# Altium PCB Conductivity.PcbDoc
Units mil, origin at the board's own origin, x right, y up, seen from the top; angles counter-clockwise.
Board outline 1417.32 x 1417.32 mil, 2 copper layers (Top Layer, Bottom Layer); 42 components, 27 nets, 107 pads, 21 vias.
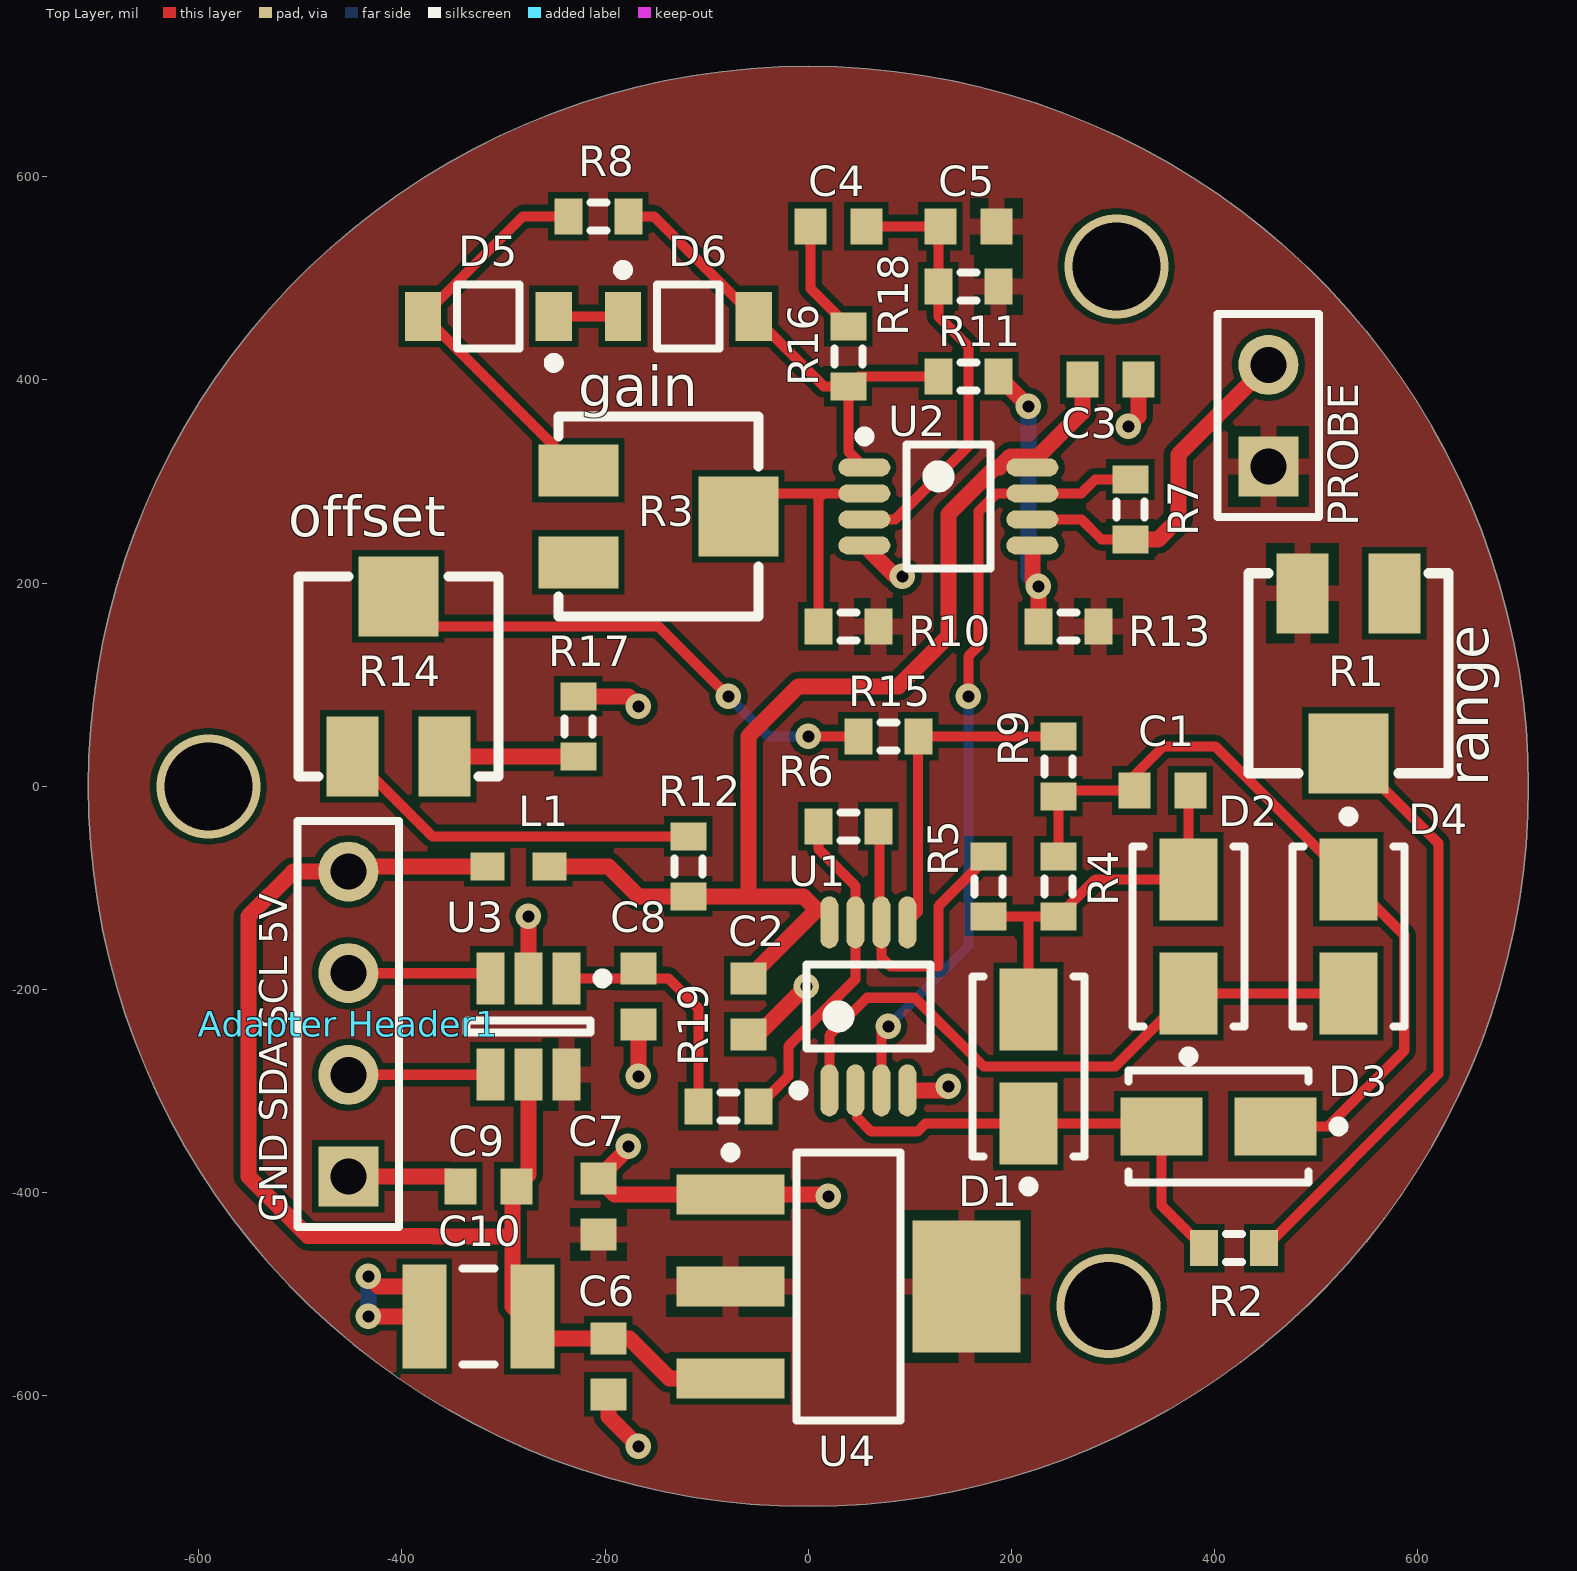
[diagram p0: Top Layer view]
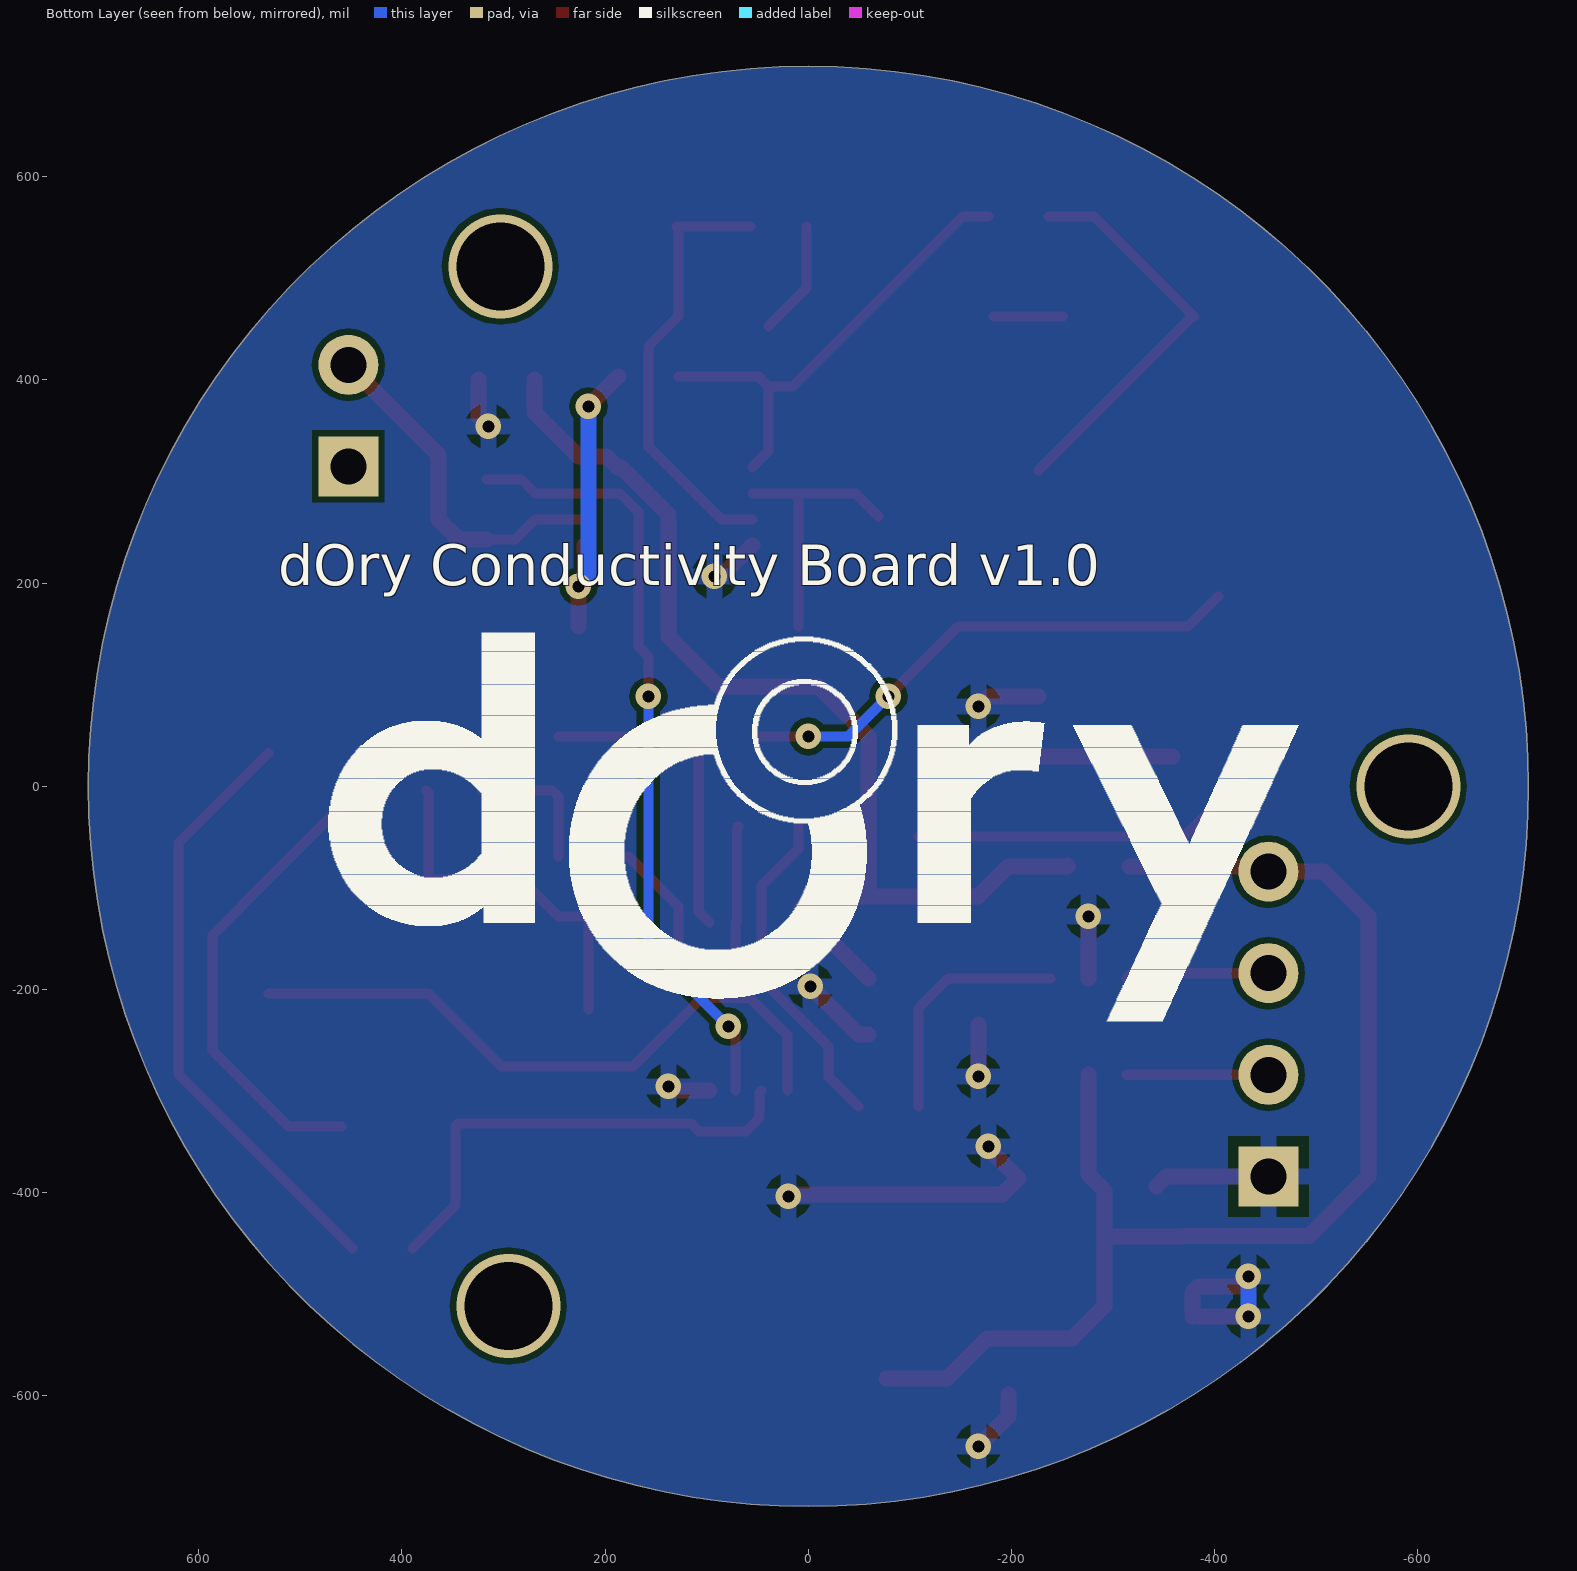
[diagram p1: Bottom Layer view, seen from below]

## Layer stack, top to bottom
Top Solder: solder mask 0.4, Solder Resist, Dk 3.5
Top Layer: signal copper 1.4
Dielectric 1: dielectric 12.6, FR-4, Dk 4.8
Bottom Layer: signal copper 1.4
Bottom Solder: solder mask 0.4, Solder Resist, Dk 3.5

## Board outline
-708.66,0 ccw(c0,0) 0,-708.66 ccw(c0,0) 708.66,0 ccw(c0,0) 0,708.66 ccw(c0,0)

## Design rules (kind name [scope] priority, off if disabled: settings)
AssemblyTestPointUsage SilkToBoardRegionClearance [All] p2:
Clearance [All] p1: gap=6
MatchedLengths DiffPair_DIFF100MatchedLengths [InDifferentialPairClass('DIFF100')] p1: tolerance=6 checknetsindiffpair=TRUE checkdiffpairvsdiffpair=FALSE checkothers=FALSE
MinimumSolderMaskSliver SilkscreenOverComponentPads_1 [All] p2: minsoldermaskwidth=10
MinimumSolderMaskSliver SilkToSolderMaskClearance [IsPad] p3: minsoldermaskwidth=10
MinimumSolderMaskSliver SilkscreenOverComponentPads [All] p4: minsoldermaskwidth=10
PolygonConnect [All] p1: connectstyle=Relief reliefconductorwidth=16 reliefentries=4 polygonreliefangle="90 Angle" airgapwidth=10
RoutingVias [All] p1: holewidth=12 width=25 viastyle="Through Hole" minholewidth=12 minwidth=25 maxholewidth=28 maxwidth=50
SilkToBoardRegionClearance SilkToBoardRegionClearance_1 [All] p1:
SilkToSolderMaskClearance SilkToSolderMaskClearance_1 [IsPad] p1: minsilkscreentomaskgap=10 clearancetoexposedcopper=TRUE
SolderMaskExpansion [All] p1: expansion=4
Width power_width [(InNet('+2.5') OR InNet('+5') OR InNet('GND')        OR InNet('VCC'))] p1: maxlimit=30 minlimit=10 preferedwidth=16 toplayer_maxwidth=20 minimp=50.000000 maximp=50.000000 favimp=50.000000
Width [All] p2: maxlimit=100 minlimit=6 preferedwidth=10
27 further rules are at their usual default settings.

## Components (designator, comment, footprint, x,y, rotation, side; value= is the part's Value field where it differs from the comment)
"Adapter Header1" "Adapter Header" "Adapter Header" -452.76,-383.86 r90 top
C1 "Cap Semi" 1608[0603] 348.52,-4.03 r0 top
C2 "Cap Semi" 1608[0603] -59.05,-216.54 r270 top
C3 "Cap Semi" 1608[0603] 297.24,400.53 r0 top
C4 "Cap Semi" 1608[0603] 29.53,551.18 r180 top
C5 "Cap Semi" 1608[0603] 157.48,551.18 r180 top
C6 "Cap Semi" 1608[0603] -196.85,-570.87 r90 top
C7 "Cap Semi" 1608[0603] -206.69,-413.39 r270 top
C8 "Cap Semi" 1608[0603] -167.32,-206.69 r90 top
C9 "Cap Semi" 1608[0603] -314.96,-393.7 r0 top
C10 "Cap Semi" C1210 -324.8,-521.65 r0 top
D1 "1N4007" VISH-DO-214AC-2_L 216.54,-275.59 r90 top
D2 "1N4007" VISH-DO-214AC-2_L 374.02,-147.64 r90 top
D3 "1N4007" VISH-DO-214AC-2_L 403.54,-334.65 r180 top
D4 "1N4007" VISH-DO-214AC-2_L 531.5,-147.64 r270 top
D5 "MBR0520LT1G" ONSC-SOD-123-2-425-04_V -314.96,462.6 r180 top
D6 "MBR0520LT1G" ONSC-SOD-123-2-425-04_V -118.11,462.6 r0 top
L1 "742861210" SMD-0603 -285.43,-78.74 r180 top
PROBE "Header 2" HDR1X2 452.76,314.96 r90 top (schematic designator PROBE1)
R1 "RPot SM" POT4MM-2 531.5,111.29 r270 top
R2 "Res3" J1-0603 419.13,-454.57 r0 top
R3 "RPot SM" POT4MM-2 -147.64,265.75 r0 top
R4 "Res3" J1-0603 246.06,-98.43 r270 top
R5 "Res3" J1-0603 177.17,-98.43 r90 top
R6 "Res3" J1-0603 39.37,-39.37 r180 top
R7 "Res3" J1-0603 316.93,272.57 r90 top
R8 "Res3" J1-0603 -206.69,561.02 r180 top
R9 "Res3" J1-0603 246.06,19.68 r90 top
R10 "Res3" J1-0603 39.37,157.48 r180 top
R11 "Res3" J1-0603 157.48,403.54 r0 top
R12 "Res3" J1-0603 -118.11,-78.74 r270 top
R13 "Res3" J1-0603 255.91,157.48 r180 top
R14 "RPot SM" POT4MM-2 -403.54,108.27 r90 top
R15 "Res3" J1-0603 78.74,49.21 r0 top
R16 "Res3" J1-0603 39.37,423.23 r90 top
R17 "Res3" J1-0603 -226.38,59.06 r270 top
R18 "Res3" J1-0603 157.48,492.13 r180 top
R19 "Res3" J1-0603 -78.74,-314.96 r180 top
U1 "LTC2055IMS8#TR" LT-MS8-8_L 59.06,-216.54 r90 top
U2 "LTC2055IMS8#TR" LT-MS8-8_L 137.8,275.59 r0 top
U3 "MCP3421A1T-E/CH" SOT-23-CH6_M -275.59,-236.22 r270 top
U4 "LM1117MP-2.5/NOPB" MP04A_M 39.37,-492.13 r0 top

## Footprints (in the part's own frame and the unit in brackets; to place one, negate y for a bottom-side part, rotate by r counter-clockwise, add the part's x,y. Pads: shape width x height; smd on the part's side, far side on the other; paste and mask are expansions set on the pad)
1608[0603] [mm] "Chip Capacitor, Body 1.6x0.8mm, IPC High Density"
  rect 0.8x0.9 smd: 1(-0.7,0) 2(0.7,0)
  body extent -0.87,-0.48 0.87,0.48, height 1.3
"Adapter Header" [mm] "Connector; Header; 4 Position"
  rect 1.5x1.5 hole 0.9: 1(0,0)
  round 1.5 hole 0.9: 2(2.54,0) 3(5.08,0) 4(7.62,0)
  silkscreen extent -1.27,-1.27 8.89,1.27
C1210 [mm] "Chip Capacitor, Body 3.2x2.5mm, IPC High Density"
  rect 1.1x2.6 smd: 1(-1.35,0) 2(1.35,0)
  silkscreen extent -0.4,-1.2 0.4,1.2, body extent -1.7,-1.35 1.7,1.35, height 1.3
HDR1X2 [mm] "Connector; Header; 2 Position"
  rect 1.5x1.5 hole 0.9: 1(0,0)
  round 1.5 hole 0.9: 2(2.54,0)
  silkscreen extent -1.27,-1.27 3.81,1.27
J1-0603 [mm] "Chip Resistor, Body 1.6x0.8mm, IPC High Density"
  rect 0.7x0.9 smd: 1(-0.75,0) 2(0.75,0)
  silkscreen extent -0.2,-0.35 0.2,0.35, body extent -0.85,-0.48 0.85,0.48, height 0.9
LT-MS8-8_L [mm] "SOP, 8-Leads, Body 3x3mm, Pitch 0.65mm, IPC High Density"
  oval 1.3x0.45 smd: 1(-2.1,0.975) 2(-2.1,0.325) 3(-2.1,-0.325) 4(-2.1,-0.975) 5(2.1,-0.975) 6(2.1,-0.325) 7(2.1,0.325) 8(2.1,0.975)
  silkscreen extent -2.22,-1.55 1.05,1.87, body extent -1.55,-1.55 1.55,1.55, height 1.1
MP04A_M [mm] "SOT223, 4-Leads, Body 6.5x3.5mm, Pitch 2.3mm, Lead Span 7mm, IPC Low Density"
  rect 2.7x1 smd: 1(-2.95,2.3) 2(-2.95,0) 3(-2.95,-2.3)
  rect 2.7x3.3 smd: 4(2.95,0)
  silkscreen extent -3.07,-3.35 1.3,3.47, body extent -1.86,-3.35 1.86,3.35, height 1.8
ONSC-SOD-123-2-425-04_V [mm] "SOD, 2-Leads, Body 2.69x1.6mm"
  rect 0.91x1.22 smd: 1(-1.635,0) 2(1.635,0)
  silkscreen extent -1.76,-0.8 0.78,1.28, body extent -1.35,-0.8 1.35,0.8, height 1.35
POT4MM-2 [mm] "Square Trimming Potentiometer"
  rect 2x1.3 smd: CCW(-2,-1.15) CW(-2,1.15)
  rect 2x2 smd: W(2,0)
  silkscreen extent -2.5,-2.5 2.5,2.5
SMD-0603 [mm] "Chip Inductor, 2-Leads, Body 1.6x0.8mm"
  rect 0.85x0.7 smd: 1(-0.775,0) 2(0.775,0)
  body extent -0.8,-0.4 0.8,0.4, height 0.79
SOT-23-CH6_M [mm] "SOT23, 6-Leads, Body 2.9x1.7mm, Pitch 0.95mm, Lead Span 2.8mm, IPC Low Density"
  rect 1.3x0.7 smd: 1(-1.2,0.95) 2(-1.2,0) 3(-1.2,-0.95) 4(1.2,-0.95) 5(1.2,0) 6(1.2,0.95)
  silkscreen extent -1.32,-1.55 0.15,1.98, body extent -0.9,-1.55 0.9,1.55, height 1.45
VISH-DO-214AC-2_L [mm] "DO-214AC, 2-Leads, Body 4.5x2.79mm, IPC High Density"
  rect 2.05x1.45 smd: 1(-1.425,0) 2(1.425,0)
  silkscreen extent -3.12,-1.4 2.25,1.4, body extent -2.25,-1.4 2.25,1.4, height 2.29

## Part data
"Adapter Header1": "Header, 4-Pin"
C1 C2 C3 C4 C5 C6 C7 C8 C9 C10: "Capacitor (Semiconductor SIM Model)"
D1 D2 D3 D4: library part CMP-0548-00220-2, "Transient Voltage Suppressor, 6.40 to 231 V, 188 V Stand-off Voltage, Uni-Directional, -55 to 155 degC, 2-pin DO-214AC, Pb-Free, Tape and Reel"
D5 D6: library part CMP-1055-00425-1, "Schottky Power Rectifier, 2-Pin SOD-123, Pb-Free, Tape and Reel"
L1: library part CMP-0220-00121-1, "SMD EMI Suppression Ferrite Bead WE-CBF HF, Z = 1000 Ohm"
PROBE: "Header, 2-Pin"
R1 R3 R14: "Square Trimming Potentiometer"
R2 R4 R5 R6 R7 R8 R9 R10 R11 R12 R13 R15 R16 R17 R18 R19: "Resistor"
U1 U2: library part CMP-0359-00930-2, "Dual Channel, Micropower Zero-Drift Operational Amplifier, 0.5 MHz Typical GBW, 0.5 V/us Typical SR, 2.7 to 6 V, 8-Pin SOP (MS8-8), Industrial, Reel"
U3: library part CMP-0188-00757-2, "18-Bit Analog-to-Digital Converter with I2C Interface and On-Board Reference, 6-Pin SOT-23, Extended Temperature, Tape and Reel"
U4: library part CMP-0062-01660-2, "800mA Low-Dropout Linear Regulator, 4-pin SOT-223, Pb-Free"

## Via types
v1: diameter 25, hole 12, Top Layer to Bottom Layer, 18 vias
v2: diameter 102.36, hole 86.61, Top Layer to Bottom Layer, 3 vias

## Nets (pads, with @x,y where several pads share a name; then routed paths per layer and width w, separated by ;. In a path a pad name is that pad's centre, name@x,y a point inside that pad or via, vN(x,y) a via of type N, cw(c..) or ccw(c..) an arc to the next point about the centre after c; other vN are vias at no path point)
+2.5: C5.1 C7.2 PROBE.1 R1.CCW R10.1 R13.1 R18.1 U3.6 U4.2 U4.4
+5: C2.1 C3.1 L1.1 R12.2 U1.8 U2.8 | length 1098
  Top Layer w16: L1.1@-254.92,-77.76 L1.1 -196.85,-78.74 -167.32,-108.27 -59.05,-108.27 ; C2.1 7.87,-122.05 7.87,-121.06 -4.92,-108.27 -59.05,-108.27 ; C3.1 269.69,368.11 226.38,324.8 198.82,324.8 187.99,313.98 184.09,313.98 137.8,267.69 137.8,147.64 88.58,98.43 -9.84,98.43 -59.05,49.21 -59.05,-108.27
EC_FILTERED_OUT: C8.2 R19.2 U3.1 | length 238.6
  Top Layer w10: U3.1 -137.8,-188.98 -108.27,-218.5 R19.2
ECV_OUT: R6.2 R19.1 U1.7 | length 330.2
  Top Layer w10: R19.1 -19.68,-285.43 -19.68,-255.91 46.26,-189.96 U1.7 46.26,-97.9 9.84,-61.48 R6.2
GND: "Adapter Header1.1" C2.2 C3.2 C6.1 C7.1 C8.1 C9.1 C10.1 R17.1 U1.4 U2.4 U3.2 U4.1 | length 1023.3
  Top Layer w16: -452.76,-383.86 -352.36,-383.86 C9.1 ; v1(-433.07,-521.65) C10.1@-383.86,-521.65 ; v1(-433.07,-482.28) -423.23,-492.13 -383.86,-492.13 -377.95,-498.03 C10.1 ; U3.2 v1(-275.59,-127.95) ; R17.1 -177.17,88.58 v1(-167.32,78.74) ; C6.1 -196.85,-620.08 v1(-167.32,-649.61) ; v1(-177.17,-354.33) -177.17,-356.3 C7.1 -190.94,-401.57 U4.1 17.72,-401.57 v1(19.69,-403.54) ; v1(-167.32,-285.43) C8.1 ; C2.2 -49.21,-244.09 v1(-1.97,-196.85) ; U2.4 83.66,208.66 90.55,208.66 v1(92.52,206.69) ; U1.4 133.86,-299.21 v1(137.8,-295.28) ; v1(314.96,354.33) 324.8,364.17 C3.2
  Bottom Layer w16: v1(-433.07,-521.65) v1(-433.07,-482.28)
"NetAdapter Header1_2": "Adapter Header1.2" U3.4 | length 139.9
  Top Layer w10: -452.76,-283.86 -313.39,-283.86 U3.4
"NetAdapter Header1_3": "Adapter Header1.3" U3.3 | length 141.9
  Top Layer w10: -452.76,-183.86 -318.11,-183.86 U3.3
NetC1_1: C1.1 D3.1 D4.1 R4.1 R9.1 | length 776.7
  Top Layer w10: R4.1 R9.1 251.87,-4.03 C1.1 320.96,10.83 349.5,39.37 400.59,39.37 D4.1 586.42,-146.46 586.42,-260.04 511.81,-334.65 D3.1
NetC1_2: C1.2 D1.2 D2.2 R4.2 R5.1 | length 391.8
  Top Layer w10: R5.1 216.54,-127.95 ; D1.2 216.54,-127.95 ; C1.2 374.02,-6.09 D2.2 282.48,-91.54 R4.2 216.54,-127.95
NetC4_1: C4.1 C5.2 R18.2 U2.3 | length 434.5
  Top Layer w10: U2.3 85.63,262.8 157.48,334.65 157.48,433.07 127.95,462.6 127.95,482.28 127.95,549.21 C5.2 C4.1
NetC4_2: C4.2 R16.2 | length 113.9
  Top Layer w10: C4.2 1.97,490.16 R16.2
NetD1_1: D1.1 D3.2 R2.1 U1.2 | length 474.5
  Top Layer w10: U1.2 47.99,-300.94 47.99,-325.83 61.97,-339.8 107.32,-339.8 115.43,-331.69 D1.1 344.49,-331.69 D3.2 347.44,-412.4 R2.1
NetD2_1: D2.1 D4.2 U1.1 | length 638
  Top Layer w10: U1.1 20.67,-245.08 57.68,-208.07 104.8,-208.07 172.32,-275.59 302.17,-275.59 D2.1 D4.2
NetD5_1: D5.1 D6.1 | length 68.1
  Top Layer w10: D5.1 D6.1
NetD5_2: D5.2 R3.CW R8.2 | length 399.6
  Top Layer w10: R8.2 -280.91,561.02 D5.2 -377.95,462.6 R3.CW
NetD6_2: D6.2 R8.1 R11.1 R16.1 U2.1 | length 464.8
  Top Layer w10: R8.1 -152.17,561.02 D6.2 15.16,393.7 R16.1 ; U2.1 39.37,329.72 R16.1 ; R11.1 49.21,403.54 R16.1
NetR1_W: R1.W R2.2 | length 594.8
  Top Layer w10: R2.2 620.08,-283.15 620.08,-56.04 R1.W
NetR3_W: R3.W R10.2 U2.2 | length 266.5
  Top Layer w10: R3.W -46.26,288.39 15.26,288.39 ; R10.2 9.84,282.97 15.26,288.39 ; U2.2 15.26,288.39
NetR5_2: R5.2 R6.1 U1.6 | length 318.6
  Top Layer w10: R6.1 70.12,-40.59 70.12,-132.13 U1.6 71.85,-168.31 80.71,-177.17 127.95,-177.17 127.95,-118.11 R5.2
NetR9_2: R9.2 R15.2 U1.5 | length 325.4
  Top Layer w10: U1.5 107.95,-123.35 107.95,48.9 R15.2 R9.2
NetR11_2: R11.2 R13.2 U2.5 | length 305.2
  Top Layer w16: R11.2 v1(216.54,374.02) ; U2.5 220.47,202.76 v1(226.38,196.85) R13.2
  Bottom Layer w16: v1(216.54,374.02) 216.54,206.69 v1(226.38,196.85)
NetR12_1: R12.1 R14.CW | length 373.2
  Top Layer w10: R14.CW -370.08,-49.21 R12.1@-108.27,-49.21
NetR14_CCW: R14.CCW R17.2 | length 131.9
  Top Layer w16: R14.CCW R17.2
NetR14_W: R14.W R15.1 | length 509.8
  Top Layer w10: R14.W -374.02,157.48 -147.64,157.48 v1(-78.74,88.58) ; v1(0,49.21) R15.1
  Bottom Layer w10: v1(-78.74,88.58) -39.37,49.21 v1(0,49.21)
PROBE_IN: PROBE.2 R7.1 U2.6 | length 348.8
  Top Layer w10: U2.6 268.7,262.8 288.45,243.04 R7.1
  Top Layer w16: R7.1 344.29,243.04 364.17,262.92 364.17,326.38 PROBE.2
VACOUT: R7.2 U1.3 U2.7 | length 771.9
  Top Layer w10: U1.3 71.85,-243.11 v1(78.74,-236.22) ; v1(157.48,88.58) 157.48,127.95 167.32,137.8 167.32,270.34 185.37,288.39 U2.7 268.7,288.39 282.42,302.1 R7.2
  Bottom Layer w10: v1(78.74,-236.22) 157.48,-157.48 v1(157.48,88.58)
VCC: "Adapter Header1.4" C6.2 C9.2 C10.2 L1.2 U3.5 U4.3 | length 1274.6
  Top Layer w16: L1.2 -447.64,-78.74 -452.76,-83.86 -507.09,-83.86 -551.18,-127.95 -551.18,-383.86 -492.41,-442.63 -368.53,-442.63 -368.25,-442.91 -291.34,-442.91 ; U3.5 -275.59,-381.89 C9.2 -291.34,-397.64 -291.34,-442.91 ; U4.3 -136.81,-582.68 -176.18,-543.31 C6.2 -259.85,-543.31 -291.34,-511.81 -291.34,-442.91
pads on no net: R1.CW R3.CCW
copper on no net:
  other v2: 295.28,-511.43 -590.55,0 303.15,511.81

## Polygon pours and split planes (outlines as drawn)
GND on Bottom Layer "btm_GND" (solid, remove dead copper, pour order 3): -708.66,0 ccw(c0,0) 0,-708.66 ccw(c0,0) 708.66,0 ccw(c0,0) 0,708.66 ccw(c0,0)
+2.5 on Top Layer "top_2V5" (solid, pour order 6): -708.66,0 ccw(c0,0) 0,-708.66 ccw(c0,0) 708.66,0 ccw(c0,0) 0,708.66 ccw(c0,0)

## Silkscreen, mask and mechanical layers (free items; w line width, h text height)
Top Overlay:
  text "gain" at -226.38,374.02 h40
  text "offset" at -511.81,246.06 h40
  text "range" at 669.29,0 h40 r90
Bottom Overlay:
  drawing of 1978 lines, arcs and shapes, not listed
  text "dOry Conductivity Board v1.0" at 521.81,198.03 h40
Mechanical 2:
  circle w10: c0,0 r708.66

## Text inside footprints (layer, text, board x,y; h text height)
"Adapter Header1": Top Overlay "GND SDA SCL 5V" at -512.76,-428.86 h27.56 r90